# Altium PCB PCB1.PcbDoc (part 4 of 10)
Units mm, origin at the board's own origin, x right, y up, seen from the top; angles counter-clockwise.
Board outline 171.83 x 244.04 mm, 2 copper layers (Top Layer, Bottom Layer); 100 components, 186 nets, 878 pads, 221 vias.
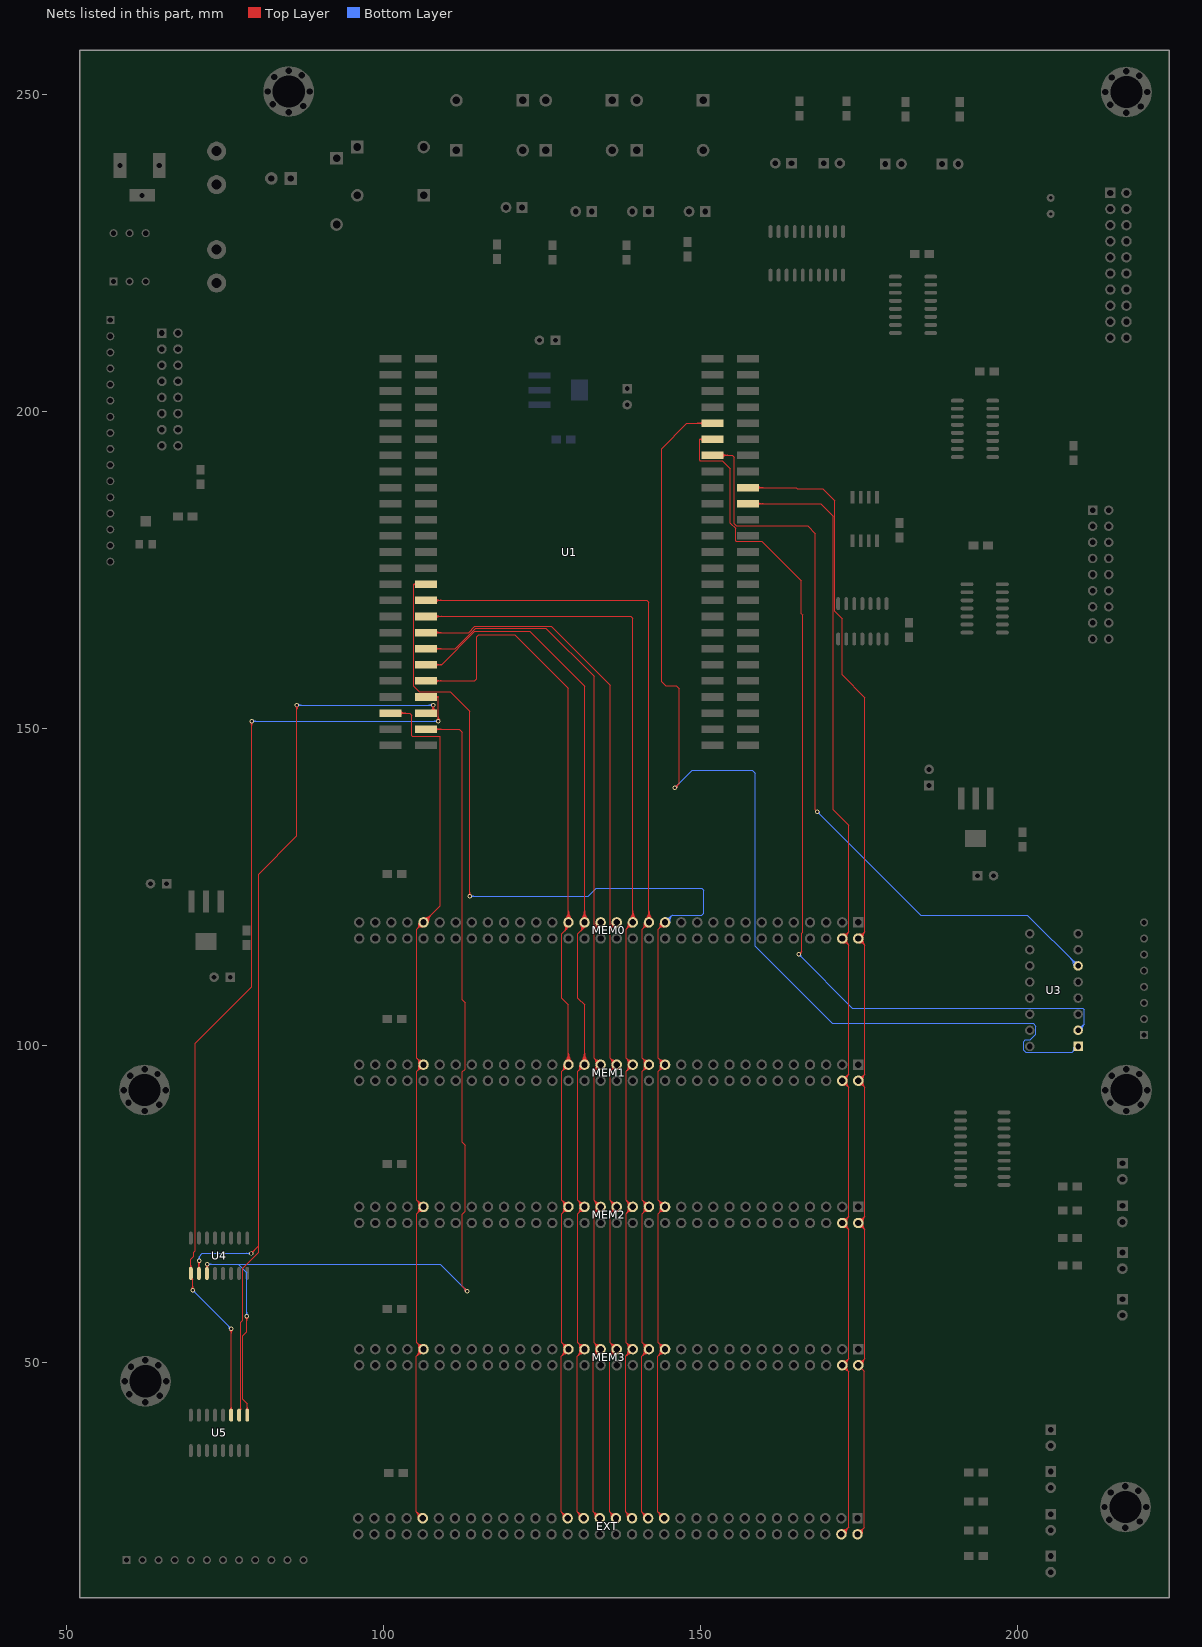
[diagram p4: the nets of this part, all layers, seen from the top]

## Via types
v1: diameter 0.7, hole 0.4, Top Layer to Bottom Layer, 221 vias

## Nets (pads, with @x,y where several pads share a name; then routed paths per layer and width w, separated by ;. In a path a pad name is that pad's centre, name@x,y a point inside that pad or via, vN(x,y) a via of type N, cw(c..) or ccw(c..) an arc to the next point about the centre after c; other vN are vias at no path point) (continued)
A12: EXT.25 MEM0.25 MEM1.25 MEM2.25 MEM3.25 U1.80 | length 250.8
  Top Layer w0.152: U1.80@105.043,172.914 cw(c104.72,173.043) 104.724,172.695 ; U1.80@105.06,172.489 ccw(c104.729,172.326) 104.724,172.695 ; U1.80@106.68,172.72 104.724,172.695 ; v1@113.395,123.688 ccw(c112.928,124.156) 113.589,124.156 ccw(c114.25,124.156) v1@113.782,123.688 ; v1(113.589,123.495) 113.589,152.654 110.49,155.753 105.639,155.753 104.724,156.667 104.724,172.695 ; EXT.25@143.535,25.531 ccw(c142.546,25.706) 143.256,26.416 ; MEM3.25@143.653,52.008 cw(c142.287,51.896) 143.256,50.927 ; MEM3.25@143.659,52.186 ccw(c142.598,52.352) 143.358,53.111 ; MEM2.25@143.659,74.391 cw(c142.598,74.225) 143.358,73.465 ; MEM2.25@143.659,74.623 ccw(c142.598,74.789) 143.358,75.548 ; MEM1.25@143.659,96.827 cw(c142.598,96.661) 143.358,95.902 ; MEM1.25@143.659,97.059 ccw(c142.598,97.225) 143.358,97.985 ; MEM0.25@143.659,119.264 cw(c142.598,119.098) 143.358,118.339 ; EXT.25@143.685,25.504 ccw(c142.897,25.644) 143.463,26.209 ccw(c144.028,26.775) EXT.25@144.168,25.987 ; MEM3.25@143.805,52.021 cw(c142.717,51.931) 143.489,51.16 cw(c144.26,50.388) MEM3.25@144.35,51.476 ; MEM3.25@143.81,52.162 ccw(c142.965,52.295) 143.57,52.899 ccw(c144.174,53.504) MEM3.25@144.307,52.659 ; MEM2.25@143.81,74.414 cw(c142.965,74.282) 143.57,73.677 cw(c144.174,73.073) MEM2.25@144.307,73.917 ; MEM2.25@143.81,74.599 ccw(c142.965,74.731) 143.57,75.336 ccw(c144.174,75.941) MEM2.25@144.307,75.096 ; MEM1.25@143.81,96.851 cw(c142.965,96.719) 143.57,96.114 cw(c144.174,95.509) MEM1.25@144.307,96.354 ; MEM1.25@143.81,97.036 ccw(c142.965,97.168) 143.57,97.773 ccw(c144.174,98.377) MEM1.25@144.307,97.533 ; MEM0.25@143.81,119.288 cw(c142.965,119.155) 143.57,118.551 cw(c144.174,117.946) MEM0.25@144.307,118.791 ; EXT.25@143.835,25.478 ccw(c143.249,25.581) 143.67,26.002 ccw(c144.091,26.423) EXT.25@144.194,25.837 ; MEM3.25@143.957,52.034 cw(c143.147,51.967) 143.721,51.392 cw(c144.296,50.818) MEM3.25@144.363,51.628 ; MEM3.25@143.96,52.139 ccw(c143.331,52.237) 143.782,52.687 ccw(c144.232,53.138) MEM3.25@144.33,52.509 ; MEM2.25@143.96,74.438 cw(c143.331,74.339) 143.782,73.889 cw(c144.232,73.439) MEM2.25@144.33,74.068 ; MEM2.25@143.96,74.575 ccw(c143.331,74.674) 143.782,75.124 ccw(c144.232,75.574) MEM2.25@144.33,74.945 ; MEM1.25@143.96,96.875 cw(c143.331,96.776) 143.782,96.326 cw(c144.232,95.876) MEM1.25@144.33,96.505 ; MEM1.25@143.96,97.012 ccw(c143.331,97.111) 143.782,97.561 ccw(c144.232,98.011) MEM1.25@144.33,97.382 ; MEM0.25@143.96,119.311 cw(c143.331,119.213) 143.782,118.763 cw(c144.232,118.312) MEM0.25@144.33,118.941 ; EXT.25@144.141,26.137 cw(c143.966,27.126) 143.256,26.416 ; EXT.25@144.272,25.4 143.256,26.416 ; MEM3.25@144.283,52.81 cw(c144.117,53.871) 143.358,53.111 ; MEM2.25@144.283,73.767 ccw(c144.117,72.706) 143.358,73.465 ; MEM2.25@144.283,75.246 cw(c144.117,76.307) 143.358,75.548 ; MEM1.25@144.283,96.204 ccw(c144.117,95.143) 143.358,95.902 ; MEM1.25@144.283,97.683 cw(c144.117,98.744) 143.358,97.985 ; MEM0.25@144.283,118.64 ccw(c144.117,117.579) 143.358,118.339 ; MEM3.25@144.337,51.324 ccw(c144.225,49.958) 143.256,50.927 ; MEM0.25@144.399,119.38 143.358,118.339 ; 143.256,26.416 143.256,50.927 ; 143.256,50.927 MEM3.25@144.399,52.07 143.358,53.111 ; 143.358,53.111 143.358,73.465 ; 143.358,73.465 MEM2.25@144.399,74.507 143.358,75.548 ; 143.358,75.548 143.358,95.902 ; 143.358,95.902 MEM1.25@144.399,96.943 143.358,97.985 ; 143.358,97.985 143.358,118.339
  Bottom Layer w0.152: v1(113.589,123.495) 132.283,123.495 133.553,124.765 150.177,124.765 150.495,124.447 150.495,120.84 150.177,120.523 145.542,120.523 ; v1@113.782,123.301 cw(c114.25,122.834) 114.25,123.495 cw(c114.25,124.156) v1@113.782,123.688 ; MEM0.25@144.399,119.38 145.542,120.523 ; MEM0.25@144.435,119.822 ccw(c144.502,120.632) 145.077,120.058 ccw(c145.651,119.483) MEM0.25@144.841,119.416 ; MEM0.25@144.448,119.974 ccw(c144.538,121.062) 145.309,120.29 ccw(c146.081,119.519) MEM0.25@144.993,119.429 ; MEM0.25@144.461,120.126 ccw(c144.573,121.492) 145.542,120.523 ; MEM0.25@145.145,119.442 cw(c146.511,119.554) 145.542,120.523
A13: EXT.27 MEM0.27 MEM1.27 MEM2.27 MEM3.27 U1.82 | length 232.7
  Top Layer w0.152: U1.82@106.68,170.18 141.541,170.18 141.859,169.862 MEM0.27@141.859,119.38 140.818,118.339 ; U1.82@108.093,169.917 cw(c108.727,169.283) 108.727,170.18 cw(c108.727,171.077) U1.82@108.093,170.443 ; U1.82@108.2,169.81 cw(c109.095,168.915) 109.095,170.18 cw(c109.095,171.445) U1.82@108.2,170.55 ; EXT.27@140.995,25.531 ccw(c140.006,25.706) 140.716,26.416 ; MEM3.27@141.113,52.008 cw(c139.747,51.896) 140.716,50.927 ; MEM3.27@141.119,52.186 ccw(c140.058,52.352) 140.818,53.111 ; MEM2.27@141.119,74.391 cw(c140.058,74.225) 140.818,73.465 ; MEM2.27@141.119,74.623 ccw(c140.058,74.789) 140.818,75.548 ; MEM1.27@141.119,96.827 cw(c140.058,96.661) 140.818,95.902 ; MEM1.27@141.119,97.059 ccw(c140.058,97.225) 140.818,97.985 ; MEM0.27@141.119,119.264 cw(c140.058,119.098) 140.818,118.339 ; EXT.27@141.145,25.504 ccw(c140.357,25.644) 140.923,26.209 ccw(c141.488,26.775) EXT.27@141.628,25.987 ; MEM3.27@141.265,52.021 cw(c140.177,51.931) 140.949,51.16 cw(c141.72,50.388) MEM3.27@141.81,51.476 ; MEM3.27@141.27,52.162 ccw(c140.425,52.295) 141.03,52.899 ccw(c141.634,53.504) MEM3.27@141.767,52.659 ; MEM2.27@141.27,74.414 cw(c140.425,74.282) 141.03,73.677 cw(c141.634,73.073) MEM2.27@141.767,73.917 ; MEM2.27@141.27,74.599 ccw(c140.425,74.731) 141.03,75.336 ccw(c141.634,75.941) MEM2.27@141.767,75.096 ; MEM1.27@141.27,96.851 cw(c140.425,96.719) 141.03,96.114 cw(c141.634,95.509) MEM1.27@141.767,96.354 ; MEM1.27@141.27,97.036 ccw(c140.425,97.168) 141.03,97.773 ccw(c141.634,98.377) MEM1.27@141.767,97.533 ; MEM0.27@141.27,119.288 cw(c140.425,119.155) 141.03,118.551 cw(c141.634,117.946) MEM0.27@141.767,118.791 ; EXT.27@141.295,25.478 ccw(c140.709,25.581) 141.13,26.002 ccw(c141.551,26.423) EXT.27@141.654,25.837 ; MEM0.27@141.33,119.909 ccw(c140.051,121.188) 141.859,121.188 ccw(c143.667,121.188) MEM0.27@142.388,119.909 ; MEM3.27@141.417,52.034 cw(c140.607,51.967) 141.181,51.392 cw(c141.756,50.818) MEM3.27@141.823,51.628 ; MEM3.27@141.42,52.139 ccw(c140.791,52.237) 141.242,52.687 ccw(c141.692,53.138) MEM3.27@141.79,52.509 ; MEM2.27@141.42,74.438 cw(c140.791,74.339) 141.242,73.889 cw(c141.692,73.439) MEM2.27@141.79,74.068 ; MEM2.27@141.42,74.575 ccw(c140.791,74.674) 141.242,75.124 ccw(c141.692,75.574) MEM2.27@141.79,74.945 ; MEM1.27@141.42,96.875 cw(c140.791,96.776) 141.242,96.326 cw(c141.692,95.876) MEM1.27@141.79,96.505 ; MEM1.27@141.42,97.012 ccw(c140.791,97.111) 141.242,97.561 ccw(c141.692,98.011) MEM1.27@141.79,97.382 ; MEM0.27@141.42,119.311 cw(c140.791,119.213) 141.242,118.763 cw(c141.692,118.312) MEM0.27@141.79,118.941 ; MEM0.27@141.437,119.802 ccw(c140.419,120.82) 141.859,120.82 ccw(c143.299,120.82) MEM0.27@142.281,119.802 ; MEM0.27@141.545,119.694 ccw(c140.787,120.452) 141.859,120.452 ccw(c142.931,120.452) MEM0.27@142.173,119.694 ; EXT.27@141.601,26.137 cw(c141.426,27.126) 140.716,26.416 ; EXT.27@141.732,25.4 140.716,26.416 ; MEM3.27@141.743,52.81 cw(c141.577,53.871) 140.818,53.111 ; MEM2.27@141.743,73.767 ccw(c141.577,72.706) 140.818,73.465 ; MEM2.27@141.743,75.246 cw(c141.577,76.307) 140.818,75.548 ; MEM1.27@141.743,96.204 ccw(c141.577,95.143) 140.818,95.902 ; MEM1.27@141.743,97.683 cw(c141.577,98.744) 140.818,97.985 ; MEM0.27@141.743,118.64 ccw(c141.577,117.579) 140.818,118.339 ; MEM3.27@141.797,51.324 ccw(c141.685,49.958) 140.716,50.927 ; 140.716,26.416 140.716,50.927 ; 140.716,50.927 MEM3.27@141.859,52.07 140.818,53.111 ; 140.818,53.111 140.818,73.465 ; 140.818,73.465 MEM2.27@141.859,74.507 140.818,75.548 ; 140.818,75.548 140.818,95.902 ; 140.818,95.902 MEM1.27@141.859,96.943 140.818,97.985 ; 140.818,97.985 140.818,118.339
A14: EXT.29 MEM0.29 MEM1.29 MEM2.29 MEM3.29 U1.84 | length 227.6
  Top Layer w0.152: U1.84@106.68,167.64 139.001,167.64 139.319,167.322 MEM0.29@139.319,119.38 138.278,118.339 ; U1.84@108.093,167.377 cw(c108.727,166.743) 108.727,167.64 cw(c108.727,168.537) U1.84@108.093,167.903 ; U1.84@108.2,167.27 cw(c109.095,166.375) 109.095,167.64 cw(c109.095,168.905) U1.84@108.2,168.01 ; EXT.29@138.455,25.531 ccw(c137.466,25.706) 138.176,26.416 ; MEM3.29@138.573,52.008 cw(c137.207,51.896) 138.176,50.927 ; MEM3.29@138.579,52.186 ccw(c137.518,52.352) 138.278,53.111 ; MEM2.29@138.579,74.391 cw(c137.518,74.225) 138.278,73.465 ; MEM2.29@138.579,74.623 ccw(c137.518,74.789) 138.278,75.548 ; MEM1.29@138.579,96.827 cw(c137.518,96.661) 138.278,95.902 ; MEM1.29@138.579,97.059 ccw(c137.518,97.225) 138.278,97.985 ; MEM0.29@138.579,119.264 cw(c137.518,119.098) 138.278,118.339 ; EXT.29@138.605,25.504 ccw(c137.817,25.644) 138.383,26.209 ccw(c138.948,26.775) EXT.29@139.088,25.987 ; MEM3.29@138.725,52.021 cw(c137.637,51.931) 138.409,51.16 cw(c139.18,50.388) MEM3.29@139.27,51.476 ; MEM3.29@138.73,52.162 ccw(c137.885,52.295) 138.49,52.899 ccw(c139.094,53.504) MEM3.29@139.227,52.659 ; MEM2.29@138.73,74.414 cw(c137.885,74.282) 138.49,73.677 cw(c139.094,73.073) MEM2.29@139.227,73.917 ; MEM2.29@138.73,74.599 ccw(c137.885,74.731) 138.49,75.336 ccw(c139.094,75.941) MEM2.29@139.227,75.096 ; MEM1.29@138.73,96.851 cw(c137.885,96.719) 138.49,96.114 cw(c139.094,95.509) MEM1.29@139.227,96.354 ; MEM1.29@138.73,97.036 ccw(c137.885,97.168) 138.49,97.773 ccw(c139.094,98.377) MEM1.29@139.227,97.533 ; MEM0.29@138.73,119.288 cw(c137.885,119.155) 138.49,118.551 cw(c139.094,117.946) MEM0.29@139.227,118.791 ; EXT.29@138.755,25.478 ccw(c138.169,25.581) 138.59,26.002 ccw(c139.011,26.423) EXT.29@139.114,25.837 ; MEM0.29@138.79,119.909 ccw(c137.511,121.188) 139.319,121.188 ccw(c141.127,121.188) MEM0.29@139.848,119.909 ; MEM3.29@138.877,52.034 cw(c138.067,51.967) 138.641,51.392 cw(c139.216,50.818) MEM3.29@139.283,51.628 ; MEM3.29@138.88,52.139 ccw(c138.251,52.237) 138.702,52.687 ccw(c139.152,53.138) MEM3.29@139.25,52.509 ; MEM2.29@138.88,74.438 cw(c138.251,74.339) 138.702,73.889 cw(c139.152,73.439) MEM2.29@139.25,74.068 ; MEM2.29@138.88,74.575 ccw(c138.251,74.674) 138.702,75.124 ccw(c139.152,75.574) MEM2.29@139.25,74.945 ; MEM1.29@138.88,96.875 cw(c138.251,96.776) 138.702,96.326 cw(c139.152,95.876) MEM1.29@139.25,96.505 ; MEM1.29@138.88,97.012 ccw(c138.251,97.111) 138.702,97.561 ccw(c139.152,98.011) MEM1.29@139.25,97.382 ; MEM0.29@138.88,119.311 cw(c138.251,119.213) 138.702,118.763 cw(c139.152,118.312) MEM0.29@139.25,118.941 ; MEM0.29@138.897,119.802 ccw(c137.879,120.82) 139.319,120.82 ccw(c140.759,120.82) MEM0.29@139.741,119.802 ; MEM0.29@139.005,119.694 ccw(c138.247,120.452) 139.319,120.452 ccw(c140.391,120.452) MEM0.29@139.633,119.694 ; EXT.29@139.061,26.137 cw(c138.886,27.126) 138.176,26.416 ; EXT.29@139.192,25.4 138.176,26.416 ; MEM3.29@139.203,52.81 cw(c139.037,53.871) 138.278,53.111 ; MEM2.29@139.203,73.767 ccw(c139.037,72.706) 138.278,73.465 ; MEM2.29@139.203,75.246 cw(c139.037,76.307) 138.278,75.548 ; MEM1.29@139.203,96.204 ccw(c139.037,95.143) 138.278,95.902 ; MEM1.29@139.203,97.683 cw(c139.037,98.744) 138.278,97.985 ; MEM0.29@139.203,118.64 ccw(c139.037,117.579) 138.278,118.339 ; MEM3.29@139.257,51.324 ccw(c139.145,49.958) 138.176,50.927 ; 138.176,26.416 138.176,50.927 ; 138.176,50.927 MEM3.29@139.319,52.07 138.278,53.111 ; 138.278,53.111 138.278,73.465 ; 138.278,73.465 MEM2.29@139.319,74.507 138.278,75.548 ; 138.278,75.548 138.278,95.902 ; 138.278,95.902 MEM1.29@139.319,96.943 138.278,97.985 ; 138.278,97.985 138.278,118.339
A15: EXT.31 MEM0.31 MEM1.31 MEM2.31 MEM3.31 U1.86 | length 211.9
  Top Layer w0.152: U1.86@106.68,165.1 113.411,165.1 114.376,166.065 126.441,166.065 135.738,156.769 135.738,118.339 ; U1.86@108.093,164.837 cw(c108.727,164.203) 108.727,165.1 cw(c108.727,165.997) U1.86@108.093,165.363 ; U1.86@108.2,164.73 cw(c109.095,163.835) 109.095,165.1 cw(c109.095,166.365) U1.86@108.2,165.47 ; EXT.31@135.915,25.531 ccw(c134.926,25.706) 135.636,26.416 ; MEM3.31@136.033,52.008 cw(c134.667,51.896) 135.636,50.927 ; MEM3.31@136.039,52.186 ccw(c134.978,52.352) 135.738,53.111 ; MEM2.31@136.039,74.391 cw(c134.978,74.225) 135.738,73.465 ; MEM2.31@136.039,74.623 ccw(c134.978,74.789) 135.738,75.548 ; MEM1.31@136.039,96.827 cw(c134.978,96.661) 135.738,95.902 ; MEM1.31@136.039,97.059 ccw(c134.978,97.225) 135.738,97.985 ; MEM0.31@136.039,119.264 cw(c134.978,119.098) 135.738,118.339 ; EXT.31@136.065,25.504 ccw(c135.277,25.644) 135.843,26.209 ccw(c136.408,26.775) EXT.31@136.548,25.987 ; MEM3.31@136.185,52.021 cw(c135.097,51.931) 135.869,51.16 cw(c136.64,50.388) MEM3.31@136.73,51.476 ; MEM3.31@136.19,52.162 ccw(c135.345,52.295) 135.95,52.899 ccw(c136.554,53.504) MEM3.31@136.687,52.659 ; MEM2.31@136.19,74.414 cw(c135.345,74.282) 135.95,73.677 cw(c136.554,73.073) MEM2.31@136.687,73.917 ; MEM2.31@136.19,74.599 ccw(c135.345,74.731) 135.95,75.336 ccw(c136.554,75.941) MEM2.31@136.687,75.096 ; MEM1.31@136.19,96.851 cw(c135.345,96.719) 135.95,96.114 cw(c136.554,95.509) MEM1.31@136.687,96.354 ; MEM1.31@136.19,97.036 ccw(c135.345,97.168) 135.95,97.773 ccw(c136.554,98.377) MEM1.31@136.687,97.533 ; MEM0.31@136.19,119.288 cw(c135.345,119.155) 135.95,118.551 cw(c136.554,117.946) MEM0.31@136.687,118.791 ; EXT.31@136.215,25.478 ccw(c135.629,25.581) 136.05,26.002 ccw(c136.471,26.423) EXT.31@136.574,25.837 ; MEM3.31@136.337,52.034 cw(c135.527,51.967) 136.101,51.392 cw(c136.676,50.818) MEM3.31@136.743,51.628 ; MEM3.31@136.34,52.139 ccw(c135.711,52.237) 136.162,52.687 ccw(c136.612,53.138) MEM3.31@136.71,52.509 ; MEM2.31@136.34,74.438 cw(c135.711,74.339) 136.162,73.889 cw(c136.612,73.439) MEM2.31@136.71,74.068 ; MEM2.31@136.34,74.575 ccw(c135.711,74.674) 136.162,75.124 ccw(c136.612,75.574) MEM2.31@136.71,74.945 ; MEM1.31@136.34,96.875 cw(c135.711,96.776) 136.162,96.326 cw(c136.612,95.876) MEM1.31@136.71,96.505 ; MEM1.31@136.34,97.012 ccw(c135.711,97.111) 136.162,97.561 ccw(c136.612,98.011) MEM1.31@136.71,97.382 ; MEM0.31@136.34,119.311 cw(c135.711,119.213) 136.162,118.763 cw(c136.612,118.312) MEM0.31@136.71,118.941 ; EXT.31@136.521,26.137 cw(c136.346,27.126) 135.636,26.416 ; EXT.31@136.652,25.4 135.636,26.416 ; MEM3.31@136.663,52.81 cw(c136.497,53.871) 135.738,53.111 ; MEM2.31@136.663,73.767 ccw(c136.497,72.706) 135.738,73.465 ; MEM2.31@136.663,75.246 cw(c136.497,76.307) 135.738,75.548 ; MEM1.31@136.663,96.204 ccw(c136.497,95.143) 135.738,95.902 ; MEM1.31@136.663,97.683 cw(c136.497,98.744) 135.738,97.985 ; MEM0.31@136.663,118.64 ccw(c136.497,117.579) 135.738,118.339 ; MEM3.31@136.717,51.324 ccw(c136.605,49.958) 135.636,50.927 ; MEM0.31@136.779,119.38 135.738,118.339 ; 135.636,26.416 135.636,50.927 ; 135.636,50.927 MEM3.31@136.779,52.07 135.738,53.111 ; 135.738,53.111 135.738,73.465 ; 135.738,73.465 MEM2.31@136.779,74.507 135.738,75.548 ; 135.738,75.548 135.738,95.902 ; 135.738,95.902 MEM1.31@136.779,96.943 135.738,97.985 ; 135.738,97.985 135.738,118.339
A16: EXT.33 MEM0.33 MEM1.33 MEM2.33 MEM3.33 U1.88 | length 211
  Top Layer w0.152: U1.88@106.68,162.56 111.277,162.56 114.503,165.786 125.603,165.786 133.198,158.191 133.198,118.339 ; U1.88@108.093,162.297 cw(c108.727,161.663) 108.727,162.56 cw(c108.727,163.457) U1.88@108.093,162.823 ; U1.88@108.2,162.19 cw(c109.095,161.295) 109.095,162.56 cw(c109.095,163.825) U1.88@108.2,162.93 ; EXT.33@133.375,25.531 ccw(c132.386,25.706) 133.096,26.416 ; MEM3.33@133.493,52.008 cw(c132.127,51.896) 133.096,50.927 ; MEM3.33@133.499,52.186 ccw(c132.438,52.352) 133.198,53.111 ; MEM2.33@133.499,74.391 cw(c132.438,74.225) 133.198,73.465 ; MEM2.33@133.499,74.623 ccw(c132.438,74.789) 133.198,75.548 ; MEM1.33@133.499,96.827 cw(c132.438,96.661) 133.198,95.902 ; MEM1.33@133.499,97.059 ccw(c132.438,97.225) 133.198,97.985 ; MEM0.33@133.499,119.264 cw(c132.438,119.098) 133.198,118.339 ; EXT.33@133.525,25.504 ccw(c132.737,25.644) 133.303,26.209 ccw(c133.868,26.775) EXT.33@134.008,25.987 ; MEM3.33@133.645,52.021 cw(c132.557,51.931) 133.329,51.16 cw(c134.1,50.388) MEM3.33@134.19,51.476 ; MEM3.33@133.65,52.162 ccw(c132.805,52.295) 133.41,52.899 ccw(c134.014,53.504) MEM3.33@134.147,52.659 ; MEM2.33@133.65,74.414 cw(c132.805,74.282) 133.41,73.677 cw(c134.014,73.073) MEM2.33@134.147,73.917 ; MEM2.33@133.65,74.599 ccw(c132.805,74.731) 133.41,75.336 ccw(c134.014,75.941) MEM2.33@134.147,75.096 ; MEM1.33@133.65,96.851 cw(c132.805,96.719) 133.41,96.114 cw(c134.014,95.509) MEM1.33@134.147,96.354 ; MEM1.33@133.65,97.036 ccw(c132.805,97.168) 133.41,97.773 ccw(c134.014,98.377) MEM1.33@134.147,97.533 ; MEM0.33@133.65,119.288 cw(c132.805,119.155) 133.41,118.551 cw(c134.014,117.946) MEM0.33@134.147,118.791 ; EXT.33@133.675,25.478 ccw(c133.089,25.581) 133.51,26.002 ccw(c133.931,26.423) EXT.33@134.034,25.837 ; MEM3.33@133.797,52.034 cw(c132.987,51.967) 133.561,51.392 cw(c134.136,50.818) MEM3.33@134.203,51.628 ; MEM3.33@133.8,52.139 ccw(c133.171,52.237) 133.622,52.687 ccw(c134.072,53.138) MEM3.33@134.17,52.509 ; MEM2.33@133.8,74.438 cw(c133.171,74.339) 133.622,73.889 cw(c134.072,73.439) MEM2.33@134.17,74.068 ; MEM2.33@133.8,74.575 ccw(c133.171,74.674) 133.622,75.124 ccw(c134.072,75.574) MEM2.33@134.17,74.945 ; MEM1.33@133.8,96.875 cw(c133.171,96.776) 133.622,96.326 cw(c134.072,95.876) MEM1.33@134.17,96.505 ; MEM1.33@133.8,97.012 ccw(c133.171,97.111) 133.622,97.561 ccw(c134.072,98.011) MEM1.33@134.17,97.382 ; MEM0.33@133.8,119.311 cw(c133.171,119.213) 133.622,118.763 cw(c134.072,118.312) MEM0.33@134.17,118.941 ; EXT.33@133.981,26.137 cw(c133.806,27.126) 133.096,26.416 ; EXT.33@134.112,25.4 133.096,26.416 ; MEM3.33@134.123,52.81 cw(c133.957,53.871) 133.198,53.111 ; MEM2.33@134.123,73.767 ccw(c133.957,72.706) 133.198,73.465 ; MEM2.33@134.123,75.246 cw(c133.957,76.307) 133.198,75.548 ; MEM1.33@134.123,96.204 ccw(c133.957,95.143) 133.198,95.902 ; MEM1.33@134.123,97.683 cw(c133.957,98.744) 133.198,97.985 ; MEM0.33@134.123,118.64 ccw(c133.957,117.579) 133.198,118.339 ; MEM3.33@134.177,51.324 ccw(c134.065,49.958) 133.096,50.927 ; MEM0.33@134.239,119.38 133.198,118.339 ; 133.096,26.416 133.096,50.927 ; 133.096,50.927 MEM3.33@134.239,52.07 133.198,53.111 ; 133.198,53.111 133.198,73.465 ; 133.198,73.465 MEM2.33@134.239,74.507 133.198,75.548 ; 133.198,75.548 133.198,95.902 ; 133.198,95.902 MEM1.33@134.239,96.943 133.198,97.985 ; 133.198,97.985 133.198,118.339
A17: EXT.35 MEM0.35 MEM1.35 MEM2.35 MEM3.35 U1.90 | length 217
  Top Layer w0.152: U1.90@106.68,160.02 109.144,160.02 114.402,165.278 123.063,165.278 131.699,156.642 MEM0.35@131.699,119.38 131.699,118.618 130.658,117.577 130.658,107.417 131.699,106.375 MEM1.35@131.699,96.943 130.658,95.902 ; U1.90@108.093,159.757 cw(c108.727,159.123) 108.727,160.02 cw(c108.727,160.917) U1.90@108.093,160.283 ; U1.90@108.2,159.65 cw(c109.095,158.755) 109.095,160.02 cw(c109.095,161.285) U1.90@108.2,160.39 ; EXT.35@130.835,25.531 ccw(c129.846,25.706) 130.556,26.416 ; MEM3.35@130.953,52.008 cw(c129.587,51.896) 130.556,50.927 ; MEM3.35@130.959,52.186 ccw(c129.898,52.352) 130.658,53.111 ; MEM2.35@130.959,74.391 cw(c129.898,74.225) 130.658,73.465 ; MEM2.35@130.959,74.623 ccw(c129.898,74.789) 130.658,75.548 ; MEM1.35@130.959,96.827 cw(c129.898,96.661) 130.658,95.902 ; EXT.35@130.985,25.504 ccw(c130.197,25.644) 130.763,26.209 ccw(c131.328,26.775) EXT.35@131.468,25.987 ; 131.039,117.958 ccw(c130.517,118.479) MEM0.35@131.104,118.926 ; MEM3.35@131.105,52.021 cw(c130.017,51.931) 130.789,51.16 cw(c131.56,50.388) MEM3.35@131.65,51.476 ; MEM3.35@131.11,52.162 ccw(c130.265,52.295) 130.87,52.899 ccw(c131.474,53.504) MEM3.35@131.607,52.659 ; MEM2.35@131.11,74.414 cw(c130.265,74.282) 130.87,73.677 cw(c131.474,73.073) MEM2.35@131.607,73.917 ; MEM2.35@131.11,74.599 ccw(c130.265,74.731) 130.87,75.336 ccw(c131.474,75.941) MEM2.35@131.607,75.096 ; MEM1.35@131.11,96.851 cw(c130.265,96.719) 130.87,96.114 cw(c131.474,95.509) MEM1.35@131.607,96.354 ; EXT.35@131.135,25.478 ccw(c130.549,25.581) 130.97,26.002 ccw(c131.391,26.423) EXT.35@131.494,25.837 ; 131.162,118.081 ccw(c130.657,118.586) MEM0.35@131.225,119.018 ; MEM1.35@131.17,97.473 ccw(c129.891,98.751) 131.699,98.751 ccw(c133.507,98.751) MEM1.35@132.228,97.473 ; MEM0.35@131.17,119.909 ccw(c129.891,121.188) 131.699,121.188 ccw(c133.507,121.188) MEM0.35@132.228,119.909 ; MEM3.35@131.257,52.034 cw(c130.447,51.967) 131.021,51.392 cw(c131.596,50.818) MEM3.35@131.663,51.628 ; MEM3.35@131.26,52.139 ccw(c130.631,52.237) 131.082,52.687 ccw(c131.532,53.138) MEM3.35@131.63,52.509 ; MEM2.35@131.26,74.438 cw(c130.631,74.339) 131.082,73.889 cw(c131.532,73.439) MEM2.35@131.63,74.068 ; MEM2.35@131.26,74.575 ccw(c130.631,74.674) 131.082,75.124 ccw(c131.532,75.574) MEM2.35@131.63,74.945 ; MEM1.35@131.26,96.875 cw(c130.631,96.776) 131.082,96.326 cw(c131.532,95.876) MEM1.35@131.63,96.505 ; MEM1.35@131.277,97.365 ccw(c130.259,98.383) 131.699,98.383 ccw(c133.139,98.383) MEM1.35@132.121,97.365 ; MEM0.35@131.277,119.802 ccw(c130.259,120.82) 131.699,120.82 ccw(c133.139,120.82) MEM0.35@132.121,119.802 ; 131.285,118.204 ccw(c130.797,118.692) MEM0.35@131.346,119.111 ; MEM1.35@131.385,97.257 ccw(c130.627,98.015) 131.699,98.015 ccw(c132.771,98.015) MEM1.35@132.013,97.257 ; MEM0.35@131.385,119.694 ccw(c130.627,120.452) 131.699,120.452 ccw(c132.771,120.452) MEM0.35@132.013,119.694 ; 131.408,118.327 ccw(c130.937,118.799) MEM0.35@131.467,119.203 ; EXT.35@131.441,26.137 cw(c131.266,27.126) 130.556,26.416 ; 131.532,118.451 ccw(c131.077,118.906) MEM0.35@131.588,119.296 ; EXT.35@131.572,25.4 130.556,26.416 ; MEM3.35@131.583,52.81 cw(c131.417,53.871) 130.658,53.111 ; MEM2.35@131.583,73.767 ccw(c131.417,72.706) 130.658,73.465 ; MEM2.35@131.583,75.246 cw(c131.417,76.307) 130.658,75.548 ; MEM1.35@131.583,96.204 ccw(c131.417,95.143) 130.658,95.902 ; MEM3.35@131.637,51.324 ccw(c131.525,49.958) 130.556,50.927 ; 130.556,26.416 130.556,50.927 ; 130.556,50.927 MEM3.35@131.699,52.07 130.658,53.111 ; 130.658,53.111 130.658,73.465 ; 130.658,73.465 MEM2.35@131.699,74.507 130.658,75.548 ; 130.658,75.548 130.658,95.902
A18: EXT.37 MEM0.37 MEM1.37 MEM2.37 MEM3.37 U1.92 | length 218.8
  Top Layer w0.152: U1.92@106.68,157.48 114.364,157.48 114.681,157.797 114.681,164.465 114.998,164.782 120.682,164.782 129.159,156.306 MEM0.37@129.159,119.38 129.159,118.618 128.118,117.577 128.118,107.417 129.159,106.375 MEM1.37@129.159,96.943 128.118,95.902 ; U1.92@108.093,157.217 cw(c108.727,156.583) 108.727,157.48 cw(c108.727,158.377) U1.92@108.093,157.743 ; U1.92@108.2,157.11 cw(c109.095,156.215) 109.095,157.48 cw(c109.095,158.745) U1.92@108.2,157.85 ; EXT.37@128.295,25.531 ccw(c127.306,25.706) 128.016,26.416 ; MEM3.37@128.413,52.008 cw(c127.047,51.896) 128.016,50.927 ; MEM3.37@128.419,52.186 ccw(c127.358,52.352) 128.118,53.111 ; MEM2.37@128.419,74.391 cw(c127.358,74.225) 128.118,73.465 ; MEM2.37@128.419,74.623 ccw(c127.358,74.789) 128.118,75.548 ; MEM1.37@128.419,96.827 cw(c127.358,96.661) 128.118,95.902 ; EXT.37@128.445,25.504 ccw(c127.657,25.644) 128.223,26.209 ccw(c128.788,26.775) EXT.37@128.928,25.987 ; 128.499,117.958 ccw(c127.977,118.479) MEM0.37@128.564,118.926 ; MEM3.37@128.565,52.021 cw(c127.477,51.931) 128.249,51.16 cw(c129.02,50.388) MEM3.37@129.11,51.476 ; MEM3.37@128.57,52.162 ccw(c127.725,52.295) 128.33,52.899 ccw(c128.934,53.504) MEM3.37@129.067,52.659 ; MEM2.37@128.57,74.414 cw(c127.725,74.282) 128.33,73.677 cw(c128.934,73.073) MEM2.37@129.067,73.917 ; MEM2.37@128.57,74.599 ccw(c127.725,74.731) 128.33,75.336 ccw(c128.934,75.941) MEM2.37@129.067,75.096 ; MEM1.37@128.57,96.851 cw(c127.725,96.719) 128.33,96.114 cw(c128.934,95.509) MEM1.37@129.067,96.354 ; EXT.37@128.595,25.478 ccw(c128.009,25.581) 128.43,26.002 ccw(c128.851,26.423) EXT.37@128.954,25.837 ; 128.622,118.081 ccw(c128.117,118.586) MEM0.37@128.685,119.018 ; MEM1.37@128.63,97.473 ccw(c127.351,98.751) 129.159,98.751 ccw(c130.967,98.751) MEM1.37@129.688,97.473 ; MEM0.37@128.63,119.909 ccw(c127.351,121.188) 129.159,121.188 ccw(c130.967,121.188) MEM0.37@129.688,119.909 ; MEM3.37@128.717,52.034 cw(c127.907,51.967) 128.481,51.392 cw(c129.056,50.818) MEM3.37@129.123,51.628 ; MEM3.37@128.72,52.139 ccw(c128.091,52.237) 128.542,52.687 ccw(c128.992,53.138) MEM3.37@129.09,52.509 ; MEM2.37@128.72,74.438 cw(c128.091,74.339) 128.542,73.889 cw(c128.992,73.439) MEM2.37@129.09,74.068 ; MEM2.37@128.72,74.575 ccw(c128.091,74.674) 128.542,75.124 ccw(c128.992,75.574) MEM2.37@129.09,74.945 ; MEM1.37@128.72,96.875 cw(c128.091,96.776) 128.542,96.326 cw(c128.992,95.876) MEM1.37@129.09,96.505 ; MEM1.37@128.737,97.365 ccw(c127.719,98.383) 129.159,98.383 ccw(c130.599,98.383) MEM1.37@129.581,97.365 ; MEM0.37@128.737,119.802 ccw(c127.719,120.82) 129.159,120.82 ccw(c130.599,120.82) MEM0.37@129.581,119.802 ; 128.745,118.204 ccw(c128.257,118.692) MEM0.37@128.806,119.111 ; MEM1.37@128.845,97.257 ccw(c128.087,98.015) 129.159,98.015 ccw(c130.231,98.015) MEM1.37@129.473,97.257 ; MEM0.37@128.845,119.694 ccw(c128.087,120.452) 129.159,120.452 ccw(c130.231,120.452) MEM0.37@129.473,119.694 ; 128.868,118.327 ccw(c128.397,118.799) MEM0.37@128.927,119.203 ; EXT.37@128.901,26.137 cw(c128.726,27.126) 128.016,26.416 ; 128.992,118.451 ccw(c128.537,118.906) MEM0.37@129.048,119.296 ; EXT.37@129.032,25.4 128.016,26.416 ; MEM3.37@129.043,52.81 cw(c128.877,53.871) 128.118,53.111 ; MEM2.37@129.043,73.767 ccw(c128.877,72.706) 128.118,73.465 ; MEM2.37@129.043,75.246 cw(c128.877,76.307) 128.118,75.548 ; MEM1.37@129.043,96.204 ccw(c128.877,95.143) 128.118,95.902 ; MEM3.37@129.097,51.324 ccw(c128.985,49.958) 128.016,50.927 ; 128.016,26.416 128.016,50.927 ; 128.016,50.927 MEM3.37@129.159,52.07 128.118,53.111 ; 128.118,53.111 128.118,73.465 ; 128.118,73.465 MEM2.37@129.159,74.507 128.118,75.548 ; 128.118,75.548 128.118,95.902
A19: U1.94 U4.1 U5.11 | length 162.5
  Top Layer w0.152: U4.1@69.434,64.881 ccw(c69.044,65.271) 69.596,65.271 ccw(c70.148,65.271) U4.1@69.758,64.881 ; U4.1@69.656,63.076 cw(c69.715,62.857) 69.875,63.017 ; v1@69.682,61.535 ccw(c69.214,62.002) 69.875,62.002 ccw(c70.536,62.002) v1@70.069,61.535 ; U4.1@69.817,63.237 ccw(c70.036,63.178) 69.875,63.017 ; v1(69.875,61.341) 69.875,63.017 ; v1@75.752,55.077 cw(c75.285,54.609) 75.946,54.609 cw(c76.607,54.609) v1@76.14,55.077 ; U5.11@75.784,42.529 ccw(c75.394,42.919) 75.946,42.919 ccw(c76.498,42.919) U5.11@76.108,42.529 ; U5.11@75.946,41.656 v1(75.946,55.27) ; v1@79.004,150.936 cw(c78.536,150.469) 79.197,150.469 cw(c79.858,150.469) v1@79.391,150.936 ; v1(79.197,151.13) 79.197,109.271 70.256,100.33 70.256,67.564 70.053,67.361 70.053,66.689 69.596,66.232 U4.1@69.596,64.008 69.596,63.297 69.875,63.017 ; U1.94@106.68,154.94 108.61,154.94 ; U1.94@108.315,154.742 cw(c108.61,154.621) 108.61,154.94 ; U1.94@108.315,155.138 ccw(c108.61,155.259) 108.61,154.94 ; v1@108.442,151.324 ccw(c107.975,151.791) 108.636,151.791 ccw(c109.297,151.791) v1@108.829,151.324 ; v1(108.636,151.13) 108.636,154.915 108.61,154.94
  Bottom Layer w0.152: v1@69.875,61.067 cw(c69.875,60.406) 70.343,60.874 cw(c70.81,61.341) v1@70.149,61.341 ; v1(69.875,61.341) v1(75.946,55.27) ; v1@75.672,55.27 ccw(c75.011,55.27) 75.479,55.738 ccw(c75.946,56.205) v1@75.946,55.544 ; v1(79.197,151.13) v1(108.636,151.13) ; v1@79.391,150.936 cw(c79.858,150.469) 79.858,151.13 cw(c79.858,151.791) v1@79.391,151.324 ; v1@108.442,150.936 ccw(c107.975,150.469) 107.975,151.13 ccw(c107.975,151.791) v1@108.442,151.324
A20: U1.96 U4.2 U5.10 | length 165.8
  Top Layer w0.152: U4.2@70.704,64.881 ccw(c70.314,65.271) 70.866,65.271 ccw(c71.418,65.271) U4.2@71.028,64.881 ; v1@70.723,65.796 cw(c70.378,65.451) 70.866,65.451 ; U4.2@70.866,64.008 70.866,65.938 v1(70.917,65.989) ; 70.866,65.206 cw(c71.7,65.206) v1@71.11,65.796 ; 70.866,65.573 cw(c71.333,65.573) v1@71.003,65.903 ; U5.10@77.216,41.656 77.216,42.367 77.495,42.647 ; U5.10@77.276,42.588 ccw(c77.335,42.807) 77.495,42.647 ; U5.10@77.437,42.427 cw(c77.656,42.486) 77.495,42.647 ; v1(79.096,67.158) 80.289,68.351 ; v1@79.096,67.431 ccw(c79.096,68.092) 79.563,67.625 ccw(c80.03,67.158) v1@79.369,67.158 ; v1@86.141,153.476 cw(c85.674,153.009) 86.335,153.009 cw(c86.996,153.009) v1@86.528,153.476 ; v1(86.335,153.67) 86.335,133.02 80.289,126.975 80.289,68.351 ; U1.96@106.68,152.4 107.823,152.4 v1(107.823,153.67) ccw(c109.084,153.67) U1.96@108.198,152.773 ; U1.96@107.46,152.77 ccw(c106.582,153.648) v1@107.823,153.648 ; U1.96@107.567,152.663 ccw(c106.95,153.28) 107.823,153.28 ; v1@107.629,153.476 cw(c107.162,153.009) 107.823,153.009 cw(c108.484,153.009) v1@108.017,153.476 ; 107.823,153.305 ccw(c108.724,153.305) U1.96@108.091,152.664 ; 77.495,42.647 77.495,56.337 77.749,56.591 77.749,64.795 80.289,67.335 80.289,68.351
  Bottom Layer w0.152: v1@70.723,66.183 ccw(c70.256,66.65) 70.917,66.65 ccw(c71.578,66.65) v1@71.11,66.183 ; v1(70.917,65.989) 70.917,66.675 71.399,67.158 v1(79.096,67.158) ; v1@78.902,66.964 ccw(c78.435,66.497) 78.435,67.158 ccw(c78.435,67.819) v1@78.902,67.351 ; v1(86.335,153.67) v1(107.823,153.67) ; v1@86.528,153.476 cw(c86.996,153.009) 86.996,153.67 cw(c86.996,154.331) v1@86.528,153.864 ; v1@107.629,153.476 ccw(c107.162,153.009) 107.162,153.67 ccw(c107.162,154.331) v1@107.629,153.864
A21: U1.98 U4.3 U5.9 | length 176
  Top Layer w0.152: U4.3@71.974,64.881 ccw(c71.584,65.271) 72.136,65.271 ccw(c72.688,65.271) U4.3@72.298,64.881 ; v1@71.993,65.262 cw(c71.648,64.917) U4.3@72.136,64.917 ; U4.3@72.136,64.008 72.136,65.405 v1(72.187,65.456) ; U4.3@72.136,64.672 cw(c72.97,64.672) v1@72.38,65.262 ; 72.136,65.04 cw(c72.603,65.04) v1@72.273,65.37 ; v1@78.216,57.045 cw(c77.749,56.578) 78.41,56.578 cw(c79.071,56.578) v1@78.603,57.045 ; U5.9@78.324,42.529 ccw(c77.934,42.919) 78.486,42.919 ccw(c79.038,42.919) U5.9@78.648,42.529 ; v1(78.41,57.239) 78.41,54.798 77.775,54.163 77.775,44.145 78.486,43.434 U5.9@78.486,41.656 ; U1.98@106.68,149.86 111.912,149.86 112.42,149.352 112.42,107.163 112.878,106.705 112.878,96.252 112.42,95.795 112.42,84.709 112.878,84.252 112.878,73.824 112.42,73.366 112.42,61.976 v1(113.182,61.214) ; U1.98@108.093,149.597 cw(c108.727,148.963) 108.727,149.86 cw(c108.727,150.757) U1.98@108.093,150.123 ; U1.98@108.2,149.49 cw(c109.095,148.595) 109.095,149.86 cw(c109.095,151.125) U1.98@108.2,150.23 ; v1@112.909,61.214 ccw(c112.248,61.214) 112.715,61.681 ccw(c113.182,62.149) v1@113.182,61.488
  Bottom Layer w0.152: v1(72.187,65.456) 77.038,65.456 ; v1@72.38,65.262 cw(c72.848,64.795) 72.848,65.456 cw(c72.848,66.117) v1@72.38,65.649 ; v1@78.216,57.433 ccw(c77.749,57.9) 78.41,57.9 ccw(c79.071,57.9) v1@78.603,57.433 ; v1(78.41,57.239) 78.41,64.084 77.038,65.456 ; v1@112.909,61.214 ccw(c112.248,61.214) 112.715,61.681 ccw(c113.182,62.149) v1@113.182,61.488 ; v1(113.182,61.214) 108.941,65.456 77.038,65.456
B: U1.9 U3.1 | length 179.4
  Top Layer w0.152: v1(145.948,140.614) 146.609,141.275 146.609,156.21 146.126,156.693 144.501,156.693 143.84,157.353 143.84,194.107 147.853,198.12 U1.9@151.892,198.12 ; v1@145.948,140.888 ccw(c145.948,141.549) 146.416,141.082 ccw(c146.883,140.614) v1@146.222,140.614 ; U1.9@150.372,197.75 ccw(c149.477,196.855) 149.477,198.12 ccw(c149.477,199.385) U1.9@150.372,198.49 ; U1.9@150.479,197.857 ccw(c149.845,197.223) 149.845,198.12 ccw(c149.845,199.017) U1.9@150.479,198.383
  Bottom Layer w0.152: v1(145.948,140.614) 148.717,143.383 158.115,143.383 158.598,142.9 158.598,115.595 170.739,103.454 202.463,103.454 202.895,103.022 202.895,101.752 201.981,100.838 201.219,100.838 200.977,100.596 200.977,99.187 201.295,98.869 208.597,98.869 ; v1@145.948,140.888 ccw(c145.948,141.549) 146.416,141.082 ccw(c146.883,140.614) v1@146.222,140.614 ; U3.1@208.883,99.727 cw(c207.882,99.584) 208.597,98.869 ; U3.1@209.034,99.748 cw(c208.259,99.638) 208.812,99.084 cw(c209.366,98.531) U3.1@209.476,99.306 ; U3.1@209.455,99.155 ccw(c209.312,98.154) 208.597,98.869 ; U3.1@209.55,99.822 208.597,98.869
C: U1.11 U3.2 | length 154.1
  Top Layer w0.152: U1.11@150.276,195.341 ccw(c149.885,195.142) 149.885,195.58 ; U1.11@150.276,195.819 cw(c149.885,196.018) 149.885,195.58 ; U1.11@150.411,195.411 ccw(c150.135,195.269) 150.135,195.58 ccw(c150.135,195.891) U1.11@150.411,195.749 ; U1.11@151.892,195.58 149.885,195.58 ; v1(165.481,114.325) 165.938,114.783 ; v1@165.485,114.599 ccw(c165.495,115.226) 165.938,114.783 ; v1@165.755,114.33 cw(c166.381,114.34) 165.938,114.783 ; 149.885,195.58 149.86,195.555 149.86,192.253 149.885,192.227 153.441,192.227 154.711,190.957 154.711,182.334 155.527,181.519 155.527,179.578 155.568,179.537 159.68,179.537 165.918,173.299 165.918,168.066 166.091,167.894 166.091,117.845 165.938,117.692 165.938,114.783
  Bottom Layer w0.152: v1@165.481,114.052 cw(c165.481,113.391) 165.948,113.858 cw(c166.416,114.325) v1@165.755,114.325 ; v1(165.481,114.325) 173.951,105.855 210.273,105.855 210.515,105.613 210.515,103.327 ; U3.2@209.55,102.362 210.515,103.327 ; U3.2@209.618,102.879 ccw(c209.725,103.681) 210.297,103.109 ccw(c210.869,102.537) U3.2@210.067,102.43 ; U3.2@209.638,103.03 ccw(c209.776,104.067) 210.515,103.327 ; U3.2@210.218,102.45 cw(c211.255,102.588) 210.515,103.327
CLK: EXT.55 MEM0.55 MEM1.55 MEM2.55 MEM3.55 U1.95 | length 188.6
  Top Layer w0.152: U1.95@101.092,152.4 104.13,152.4 104.447,152.082 104.447,148.819 104.489,148.777 108.864,148.777 108.915,148.727 108.915,121.996 MEM0.55@106.299,119.38 105.258,118.339 ; U1.95@102.505,152.137 cw(c103.139,151.503) 103.139,152.4 cw(c103.139,153.297) U1.95@102.505,152.663 ; U1.95@102.612,152.03 cw(c103.507,151.135) 103.507,152.4 cw(c103.507,153.665) U1.95@102.612,152.77 ; EXT.55@105.435,25.531 ccw(c104.446,25.706) 105.156,26.416 ; MEM3.55@105.553,52.008 cw(c104.187,51.896) 105.156,50.927 ; MEM3.55@105.559,52.186 ccw(c104.498,52.352) 105.258,53.111 ; MEM2.55@105.559,74.391 cw(c104.498,74.225) 105.258,73.465 ; MEM2.55@105.559,74.623 ccw(c104.498,74.789) 105.258,75.548 ; MEM1.55@105.559,96.827 cw(c104.498,96.661) 105.258,95.902 ; MEM1.55@105.559,97.059 ccw(c104.498,97.225) 105.258,97.985 ; MEM0.55@105.559,119.264 cw(c104.498,119.098) 105.258,118.339 ; EXT.55@105.585,25.504 ccw(c104.797,25.644) 105.363,26.209 ccw(c105.928,26.775) EXT.55@106.068,25.987 ; MEM3.55@105.705,52.021 cw(c104.617,51.931) 105.389,51.16 cw(c106.16,50.388) MEM3.55@106.25,51.476 ; MEM3.55@105.71,52.162 ccw(c104.865,52.295) 105.47,52.899 ccw(c106.074,53.504) MEM3.55@106.207,52.659 ; MEM2.55@105.71,74.414 cw(c104.865,74.282) 105.47,73.677 cw(c106.074,73.073) MEM2.55@106.207,73.917 ; MEM2.55@105.71,74.599 ccw(c104.865,74.731) 105.47,75.336 ccw(c106.074,75.941) MEM2.55@106.207,75.096 ; MEM1.55@105.71,96.851 cw(c104.865,96.719) 105.47,96.114 cw(c106.074,95.509) MEM1.55@106.207,96.354 ; MEM1.55@105.71,97.036 ccw(c104.865,97.168) 105.47,97.773 ccw(c106.074,98.377) MEM1.55@106.207,97.533 ; MEM0.55@105.71,119.288 cw(c104.865,119.155) 105.47,118.551 cw(c106.074,117.946) MEM0.55@106.207,118.791 ; EXT.55@105.735,25.478 ccw(c105.149,25.581) 105.57,26.002 ccw(c105.991,26.423) EXT.55@106.094,25.837 ; MEM3.55@105.857,52.034 cw(c105.047,51.967) 105.621,51.392 cw(c106.196,50.818) MEM3.55@106.263,51.628 ; MEM3.55@105.86,52.139 ccw(c105.231,52.237) 105.682,52.687 ccw(c106.132,53.138) MEM3.55@106.23,52.509 ; MEM2.55@105.86,74.438 cw(c105.231,74.339) 105.682,73.889 cw(c106.132,73.439) MEM2.55@106.23,74.068 ; MEM2.55@105.86,74.575 ccw(c105.231,74.674) 105.682,75.124 ccw(c106.132,75.574) MEM2.55@106.23,74.945 ; MEM1.55@105.86,96.875 cw(c105.231,96.776) 105.682,96.326 cw(c106.132,95.876) MEM1.55@106.23,96.505 ; MEM1.55@105.86,97.012 ccw(c105.231,97.111) 105.682,97.561 ccw(c106.132,98.011) MEM1.55@106.23,97.382 ; MEM0.55@105.86,119.311 cw(c105.231,119.213) 105.682,118.763 cw(c106.132,118.312) MEM0.55@106.23,118.941 ; EXT.55@106.041,26.137 cw(c105.866,27.126) 105.156,26.416 ; EXT.55@106.172,25.4 105.156,26.416 ; MEM3.55@106.183,52.81 cw(c106.017,53.871) 105.258,53.111 ; MEM2.55@106.183,73.767 ccw(c106.017,72.706) 105.258,73.465 ; MEM2.55@106.183,75.246 cw(c106.017,76.307) 105.258,75.548 ; MEM1.55@106.183,96.204 ccw(c106.017,95.143) 105.258,95.902 ; MEM1.55@106.183,97.683 cw(c106.017,98.744) 105.258,97.985 ; MEM0.55@106.183,118.64 ccw(c106.017,117.579) 105.258,118.339 ; MEM3.55@106.237,51.324 ccw(c106.125,49.958) 105.156,50.927 ; MEM0.55@106.299,119.824 ccw(c106.299,120.896) 107.057,120.138 ccw(c107.815,119.38) MEM0.55@106.743,119.38 ; MEM0.55@106.299,119.976 ccw(c106.299,121.416) 107.317,120.398 ccw(c108.335,119.38) MEM0.55@106.895,119.38 ; MEM0.55@106.299,120.129 ccw(c106.299,121.937) 107.577,120.658 ccw(c108.856,119.38) MEM0.55@107.048,119.38 ; 105.156,26.416 105.156,50.927 ; 105.156,50.927 MEM3.55@106.299,52.07 105.258,53.111 ; 105.258,53.111 105.258,73.465 ; 105.258,73.465 MEM2.55@106.299,74.507 105.258,75.548 ; 105.258,75.548 105.258,95.902 ; 105.258,95.902 MEM1.55@106.299,96.943 105.258,97.985 ; 105.258,97.985 105.258,118.339
D: U1.13 U3.6 | length 133
  Top Layer w0.152: U1.13@151.892,193.04 155.004,193.04 155.321,192.722 155.321,182.245 155.626,181.94 166.878,181.94 168.097,180.721 168.097,137.16 v1(168.402,136.855) ; U1.13@153.305,192.777 cw(c153.939,192.143) 153.939,193.04 cw(c153.939,193.937) U1.13@153.305,193.303 ; U1.13@153.412,192.67 cw(c154.307,191.775) 154.307,193.04 cw(c154.307,194.305) U1.13@153.412,193.41
  Bottom Layer w0.152: v1@168.402,136.581 cw(c168.402,135.92) 168.869,136.388 cw(c169.337,136.855) v1@168.676,136.855 ; v1(168.402,136.855) 184.709,120.548 201.524,120.548 U3.6@209.55,112.522 ; U3.6@208.876,112.522 ccw(c207.25,112.522) 208.4,113.672 ccw(c209.55,114.822) U3.6@209.55,113.196 ; U3.6@209.029,112.522 ccw(c207.77,112.522) 208.66,113.412 ccw(c209.55,114.302) U3.6@209.55,113.043 ; U3.6@209.181,112.522 ccw(c208.29,112.522) 208.92,113.152 ccw(c209.55,113.782) U3.6@209.55,112.891
D00: EXT.2 MEM0.2 MEM1.2 MEM2.2 MEM3.2 U1.18 | length 225.4
  Top Layer w0.152: U1.18@157.48,187.96 165.114,187.96 165.252,187.822 169.277,187.822 171.196,185.903 171.196,168.453 172.339,167.31 172.339,158.42 175.92,154.838 175.92,117.881 ; U1.18@158.893,187.697 cw(c159.527,187.063) 159.527,187.96 cw(c159.527,188.857) U1.18@158.893,188.223 ; U1.18@159,187.59 cw(c159.895,186.695) 159.895,187.96 cw(c159.895,189.225) U1.18@159,188.33 ; EXT.2@174.752,22.86 175.793,23.901 ; EXT.2@174.821,23.299 ccw(c174.919,23.928) 175.369,23.477 ccw(c175.82,23.027) EXT.2@175.191,22.929 ; EXT.2@174.844,23.449 ccw(c174.977,24.294) 175.581,23.689 ccw(c176.186,23.085) EXT.2@175.341,22.952 ; EXT.2@174.868,23.6 ccw(c175.034,24.661) 175.793,23.901 ; MEM3.2@174.948,49.969 ccw(c175.046,50.598) 175.496,50.147 ccw(c175.947,49.697) MEM3.2@175.318,49.599 ; MEM2.2@174.948,71.528 cw(c175.046,70.899) 175.496,71.349 cw(c175.947,71.799) MEM2.2@175.318,71.898 ; MEM2.2@174.948,72.405 ccw(c175.046,73.034) 175.496,72.584 ccw(c175.947,72.134) MEM2.2@175.318,72.035 ; MEM1.2@174.948,93.965 cw(c175.046,93.336) 175.496,93.786 cw(c175.947,94.236) MEM1.2@175.318,94.335 ; MEM1.2@174.948,94.842 ccw(c175.046,95.471) 175.496,95.021 ccw(c175.947,94.571) MEM1.2@175.318,94.472 ; MEM0.2@174.948,116.401 cw(c175.046,115.772) 175.496,116.223 cw(c175.947,116.673) MEM0.2@175.318,116.771 ; MEM0.2@174.948,117.279 ccw(c175.046,117.908) 175.496,117.457 ccw(c175.947,117.007) MEM0.2@175.318,116.909 ; MEM3.2@174.971,50.119 ccw(c175.104,50.964) 175.708,50.359 ccw(c176.313,49.755) MEM3.2@175.468,49.622 ; MEM2.2@174.971,71.377 cw(c175.104,70.533) 175.708,71.137 cw(c176.313,71.742) MEM2.2@175.468,71.874 ; MEM2.2@174.971,72.556 ccw(c175.104,73.401) 175.708,72.796 ccw(c176.313,72.191) MEM2.2@175.468,72.059 ; MEM1.2@174.971,93.814 cw(c175.104,92.969) 175.708,93.574 cw(c176.313,94.179) MEM1.2@175.468,94.311 ; MEM1.2@174.971,94.993 ccw(c175.104,95.837) 175.708,95.233 ccw(c176.313,94.628) MEM1.2@175.468,94.496 ; MEM0.2@174.971,116.251 cw(c175.104,115.406) 175.708,116.011 cw(c176.313,116.615) MEM0.2@175.468,116.748 ; MEM0.2@174.971,117.429 ccw(c175.104,118.274) 175.708,117.669 ccw(c176.313,117.065) MEM0.2@175.468,116.932 ; MEM3.2@174.995,50.27 ccw(c175.161,51.331) 175.92,50.571 ; MEM2.2@174.995,71.227 cw(c175.161,70.166) 175.92,70.925 ; MEM2.2@174.995,72.706 ccw(c175.161,73.767) 175.92,73.008 ; MEM1.2@174.995,93.664 cw(c175.161,92.603) 175.92,93.362 ; MEM1.2@174.995,95.143 ccw(c175.161,96.204) 175.92,95.445 ; MEM0.2@174.995,116.1 cw(c175.161,115.039) 175.92,115.799 ; MEM0.2@174.995,117.58 ccw(c175.161,118.641) 175.92,117.881 ; EXT.2@175.492,22.976 cw(c176.553,23.142) 175.793,23.901 ; MEM3.2@175.619,49.646 cw(c176.68,49.812) 175.92,50.571 ; MEM2.2@175.619,71.851 ccw(c176.68,71.685) 175.92,70.925 ; MEM2.2@175.619,72.083 cw(c176.68,72.249) 175.92,73.008 ; MEM1.2@175.619,94.287 ccw(c176.68,94.121) 175.92,93.362 ; MEM1.2@175.619,94.519 cw(c176.68,94.685) 175.92,95.445 ; MEM0.2@175.619,116.724 ccw(c176.68,116.558) 175.92,115.799 ; MEM0.2@175.619,116.956 cw(c176.68,117.122) 175.92,117.881 ; 175.793,23.901 175.793,48.616 MEM3.2@174.879,49.53 175.92,50.571 ; 175.92,50.571 175.92,70.925 ; 175.92,70.925 MEM2.2@174.879,71.967 175.92,73.008 ; 175.92,73.008 175.92,93.362 ; 175.92,93.362 MEM1.2@174.879,94.403 175.92,95.445 ; 175.92,95.445 175.92,115.799 ; 175.92,115.799 MEM0.2@174.879,116.84 175.92,117.881
D01: EXT.4 MEM0.4 MEM1.4 MEM2.4 MEM3.4 U1.20 | length 227.3
  Top Layer w0.152: U1.20@157.48,185.42 168.962,185.42 170.917,183.466 170.917,137.185 173.38,134.722 173.38,117.881 ; U1.20@158.893,185.157 cw(c159.527,184.523) 159.527,185.42 cw(c159.527,186.317) U1.20@158.893,185.683 ; U1.20@159,185.05 cw(c159.895,184.155) 159.895,185.42 cw(c159.895,186.685) U1.20@159,185.79 ; EXT.4@172.212,22.86 173.355,24.003 ; EXT.4@172.248,23.302 ccw(c172.315,24.112) 172.89,23.538 ccw(c173.464,22.963) EXT.4@172.654,22.896 ; EXT.4@172.261,23.454 ccw(c172.351,24.542) 173.122,23.77 ccw(c173.894,22.999) EXT.4@172.806,22.909 ; EXT.4@172.274,23.606 ccw(c172.386,24.972) 173.355,24.003 ; MEM3.4@172.408,49.969 ccw(c172.506,50.598) 172.956,50.147 ccw(c173.407,49.697) MEM3.4@172.778,49.599 ; MEM2.4@172.408,71.528 cw(c172.506,70.899) 172.956,71.349 cw(c173.407,71.799) MEM2.4@172.778,71.898 ; MEM2.4@172.408,72.405 ccw(c172.506,73.034) 172.956,72.584 ccw(c173.407,72.134) MEM2.4@172.778,72.035 ; MEM1.4@172.408,93.965 cw(c172.506,93.336) 172.956,93.786 cw(c173.407,94.236) MEM1.4@172.778,94.335 ; MEM1.4@172.408,94.842 ccw(c172.506,95.471) 172.956,95.021 ccw(c173.407,94.571) MEM1.4@172.778,94.472 ; MEM0.4@172.408,116.401 cw(c172.506,115.772) 172.956,116.223 cw(c173.407,116.673) MEM0.4@172.778,116.771 ; MEM0.4@172.408,117.279 ccw(c172.506,117.908) 172.956,117.457 ccw(c173.407,117.007) MEM0.4@172.778,116.909 ; MEM3.4@172.417,49.093 cw(c172.52,48.507) 172.941,48.928 cw(c173.362,49.349) MEM3.4@172.776,49.452 ; MEM3.4@172.431,50.119 ccw(c172.564,50.964) 173.168,50.359 ccw(c173.773,49.755) MEM3.4@172.928,49.622 ; MEM2.4@172.431,71.377 cw(c172.564,70.533) 173.168,71.137 cw(c173.773,71.742) MEM2.4@172.928,71.874 ; MEM2.4@172.431,72.556 ccw(c172.564,73.401) 173.168,72.796 ccw(c173.773,72.191) MEM2.4@172.928,72.059 ; MEM1.4@172.431,93.814 cw(c172.564,92.969) 173.168,93.574 cw(c173.773,94.179) MEM1.4@172.928,94.311 ; MEM1.4@172.431,94.993 ccw(c172.564,95.837) 173.168,95.233 ccw(c173.773,94.628) MEM1.4@172.928,94.496 ; MEM0.4@172.431,116.251 cw(c172.564,115.406) 173.168,116.011 cw(c173.773,116.615) MEM0.4@172.928,116.748 ; MEM0.4@172.431,117.429 ccw(c172.564,118.274) 173.168,117.669 ccw(c173.773,117.065) MEM0.4@172.928,116.932 ; MEM3.4@172.443,48.943 cw(c172.583,48.155) 173.148,48.721 cw(c173.714,49.286) MEM3.4@172.926,49.426 ; MEM3.4@172.455,50.27 ccw(c172.621,51.331) 173.38,50.571 ; MEM2.4@172.455,71.227 cw(c172.621,70.166) 173.38,70.925 ; MEM2.4@172.455,72.706 ccw(c172.621,73.767) 173.38,73.008 ; MEM1.4@172.455,93.664 cw(c172.621,92.603) 173.38,93.362 ; MEM1.4@172.455,95.143 ccw(c172.621,96.204) 173.38,95.445 ; MEM0.4@172.455,116.1 cw(c172.621,115.039) 173.38,115.799 ; MEM0.4@172.455,117.58 ccw(c172.621,118.641) 173.38,117.881 ; MEM3.4@172.47,48.793 cw(c172.645,47.804) 173.355,48.514 ; EXT.4@172.958,22.922 cw(c174.324,23.034) 173.355,24.003 ; MEM3.4@173.076,49.399 ccw(c174.065,49.224) 173.355,48.514 ; MEM3.4@173.079,49.646 cw(c174.14,49.812) 173.38,50.571 ; MEM2.4@173.079,71.851 ccw(c174.14,71.685) 173.38,70.925 ; MEM2.4@173.079,72.083 cw(c174.14,72.249) 173.38,73.008 ; MEM1.4@173.079,94.287 ccw(c174.14,94.121) 173.38,93.362 ; MEM1.4@173.079,94.519 cw(c174.14,94.685) 173.38,95.445 ; MEM0.4@173.079,116.724 ccw(c174.14,116.558) 173.38,115.799 ; MEM0.4@173.079,116.956 cw(c174.14,117.122) 173.38,117.881 ; 173.355,24.003 173.355,48.514 ; 173.355,48.514 MEM3.4@172.339,49.53 173.38,50.571 ; 173.38,50.571 173.38,70.925 ; 173.38,70.925 MEM2.4@172.339,71.967 173.38,73.008 ; 173.38,73.008 173.38,93.362 ; 173.38,93.362 MEM1.4@172.339,94.403 173.38,95.445 ; 173.38,95.445 173.38,115.799 ; 173.38,115.799 MEM0.4@172.339,116.84 173.38,117.881